# Altium PCB ife18_TS_BMS_Master_STM32.PcbDoc
Units mm, origin at the board's own origin, x right, y up, seen from the top; angles counter-clockwise.
Board outline 95.25 x 63 mm, 2 copper layers (Top Layer, Bottom Layer); 67 components, 59 nets, 264 pads, 68 vias.
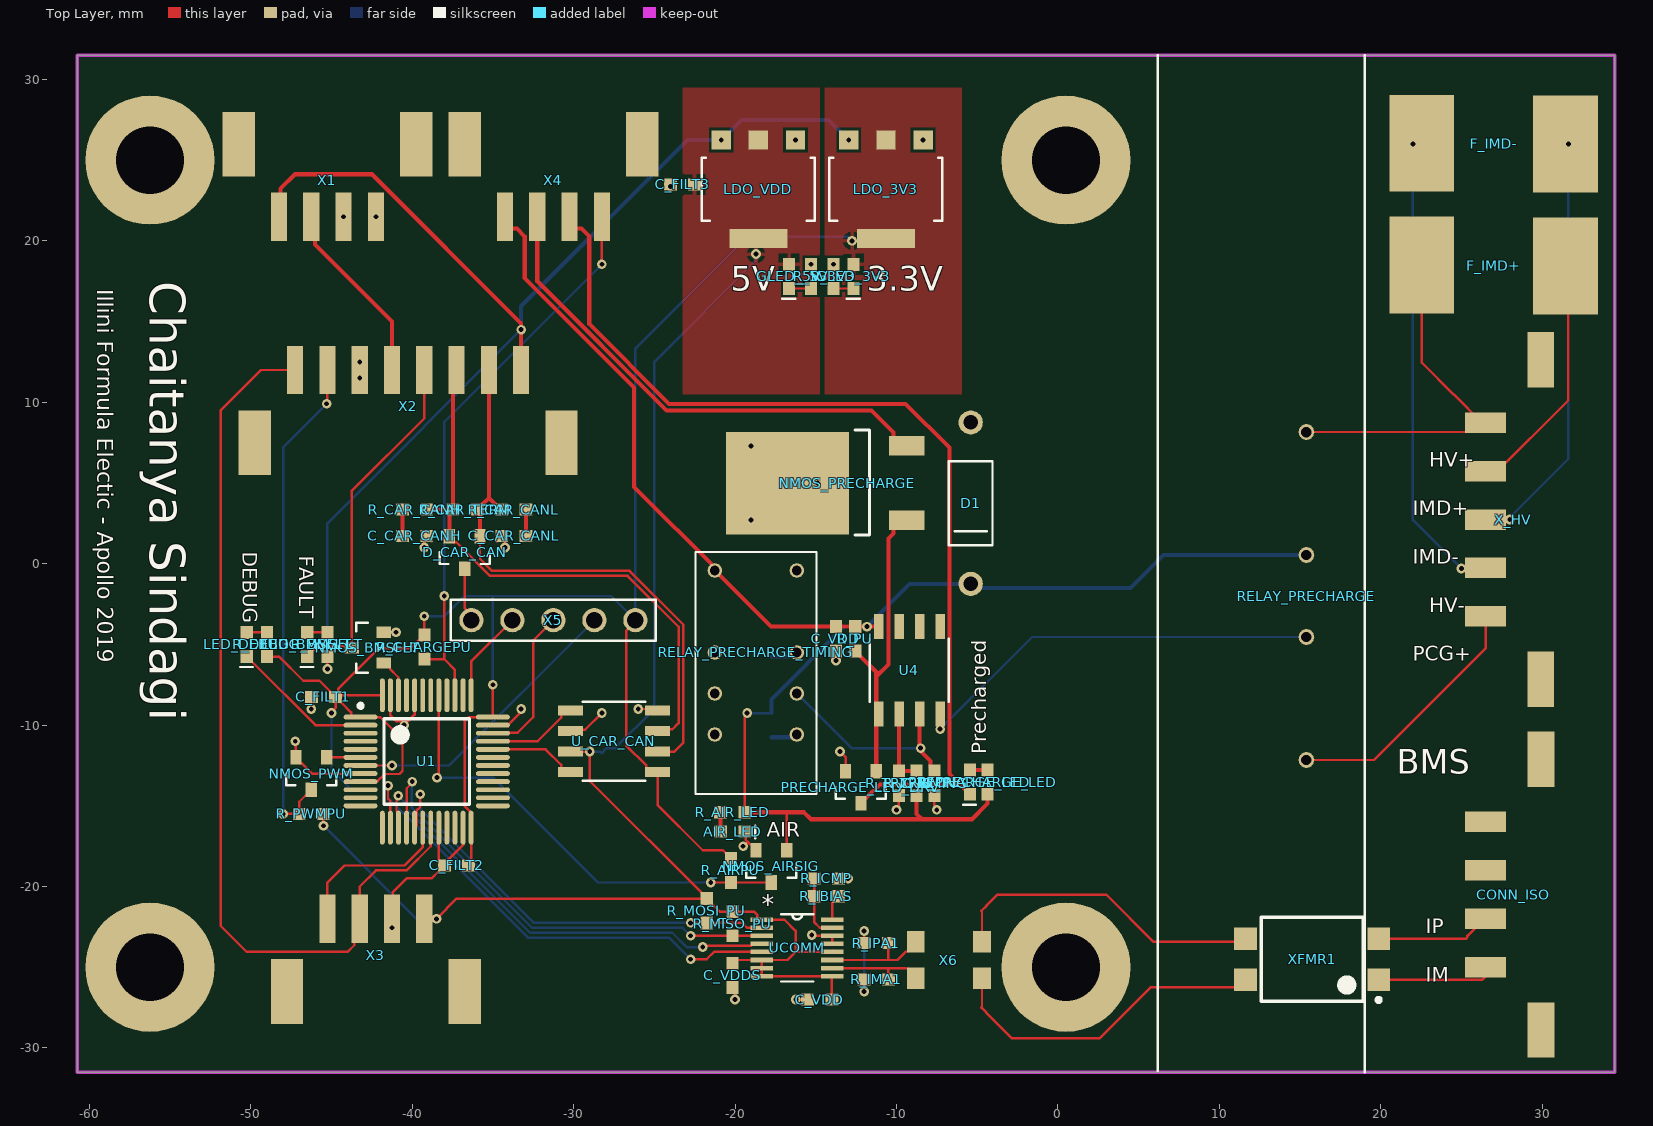
[diagram p0: Top Layer view]
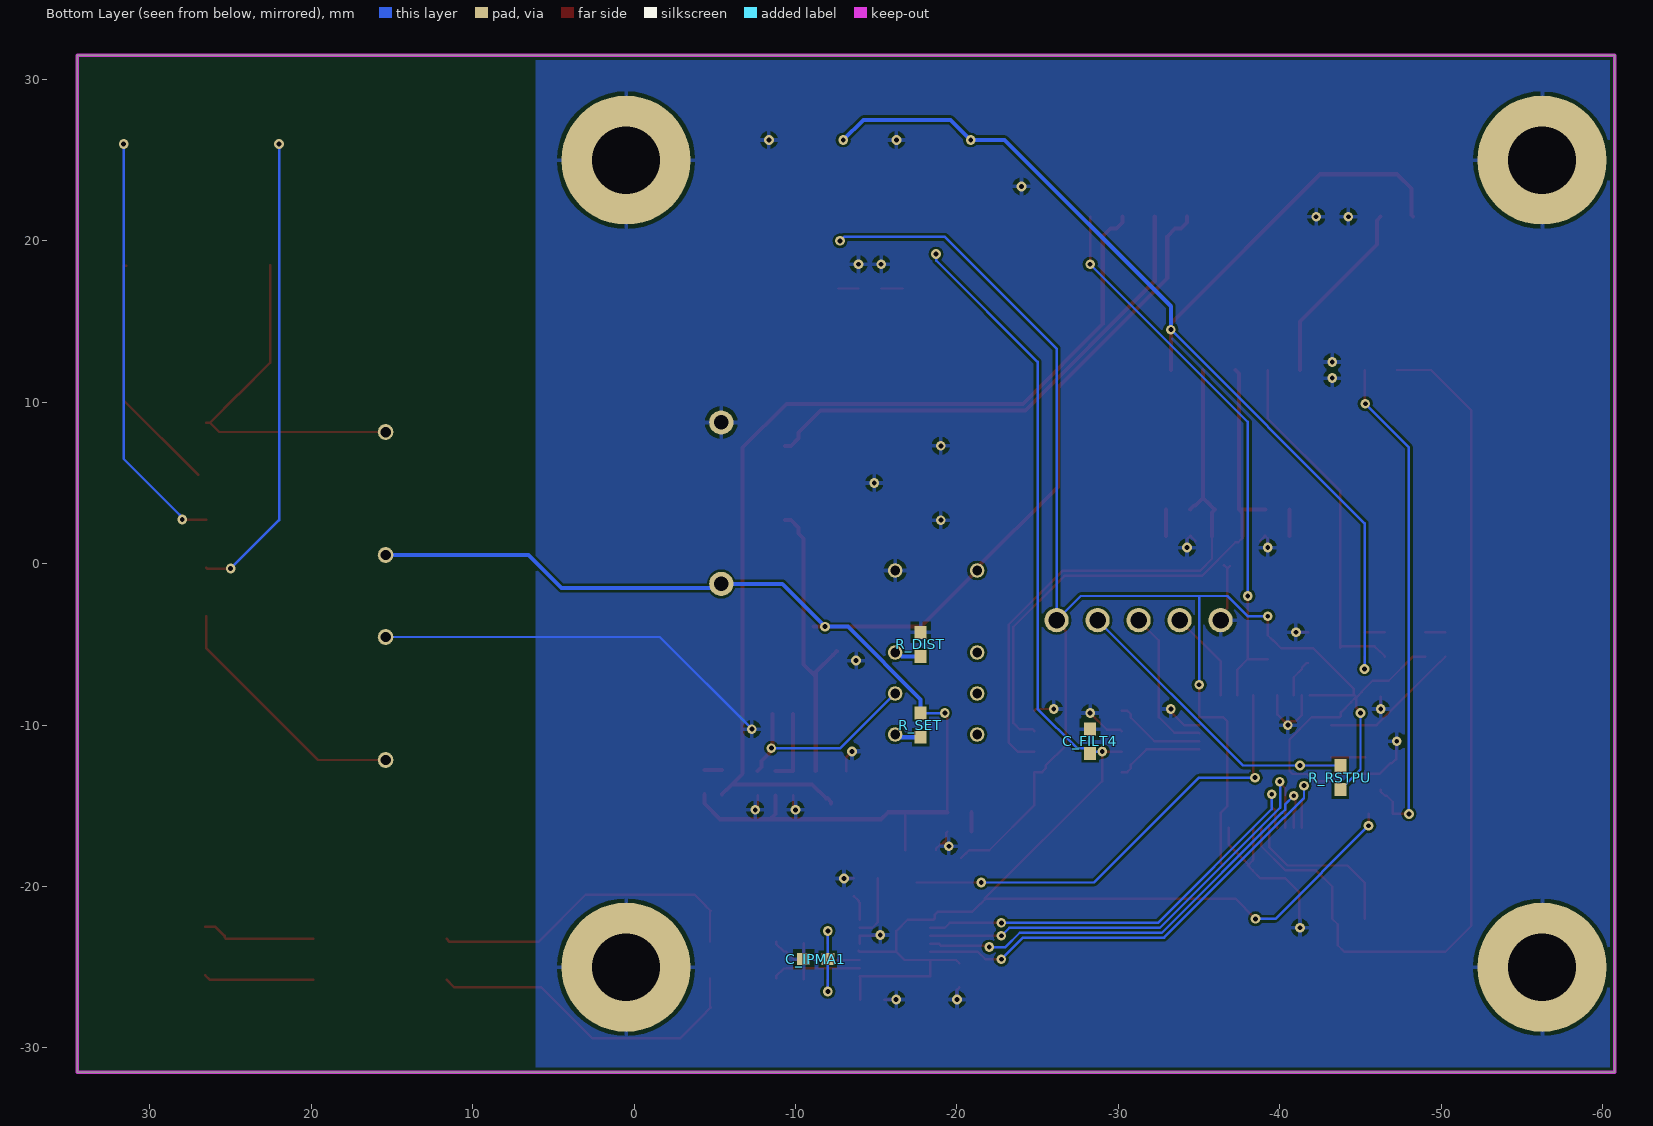
[diagram p1: Bottom Layer view, seen from below]
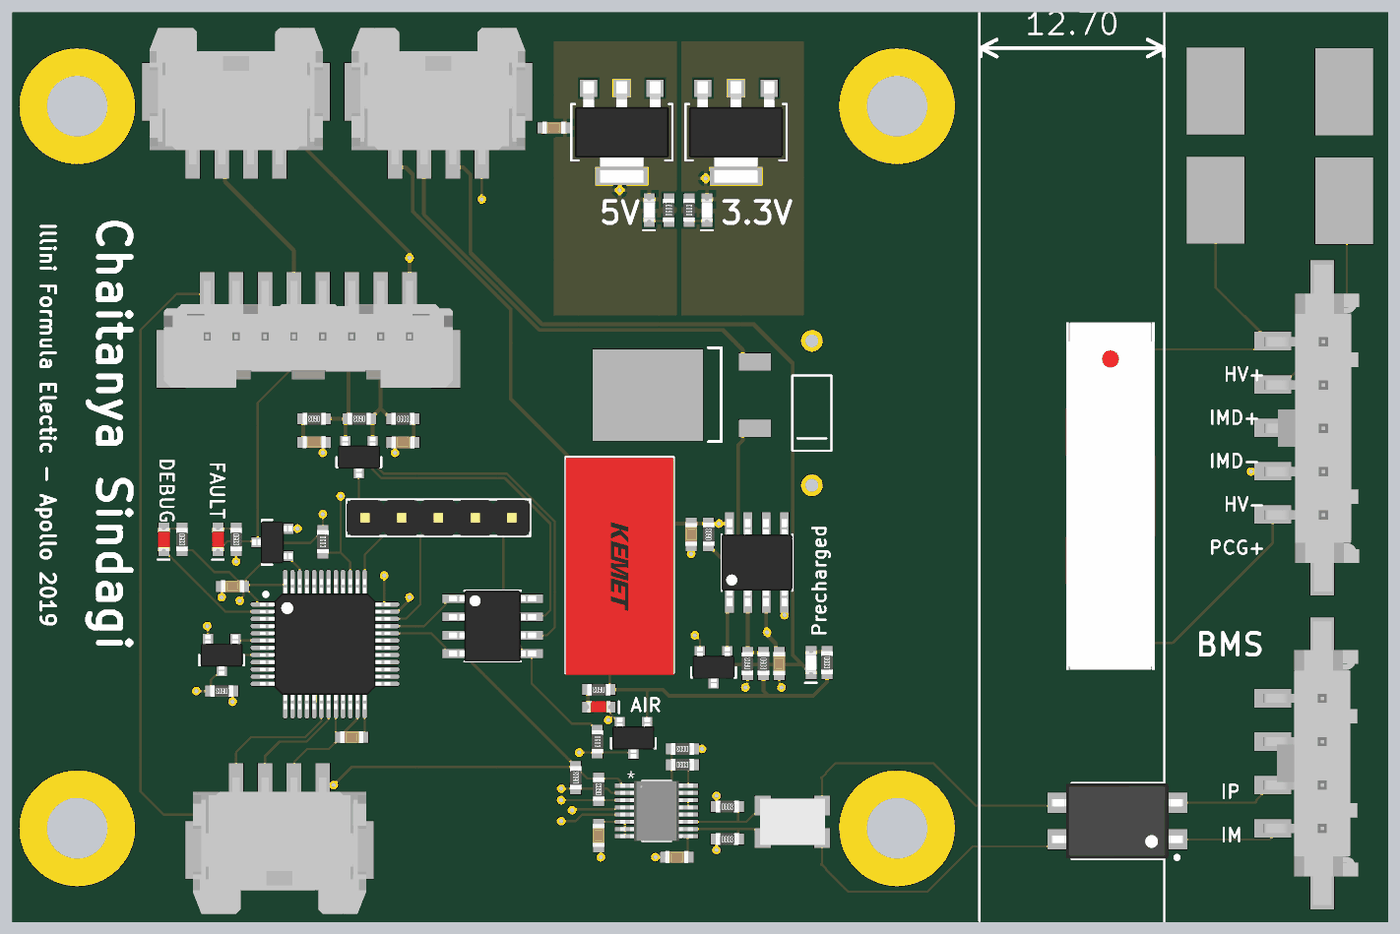
[diagram p2: 3D render of the assembled board from above, using the file's embedded part models]
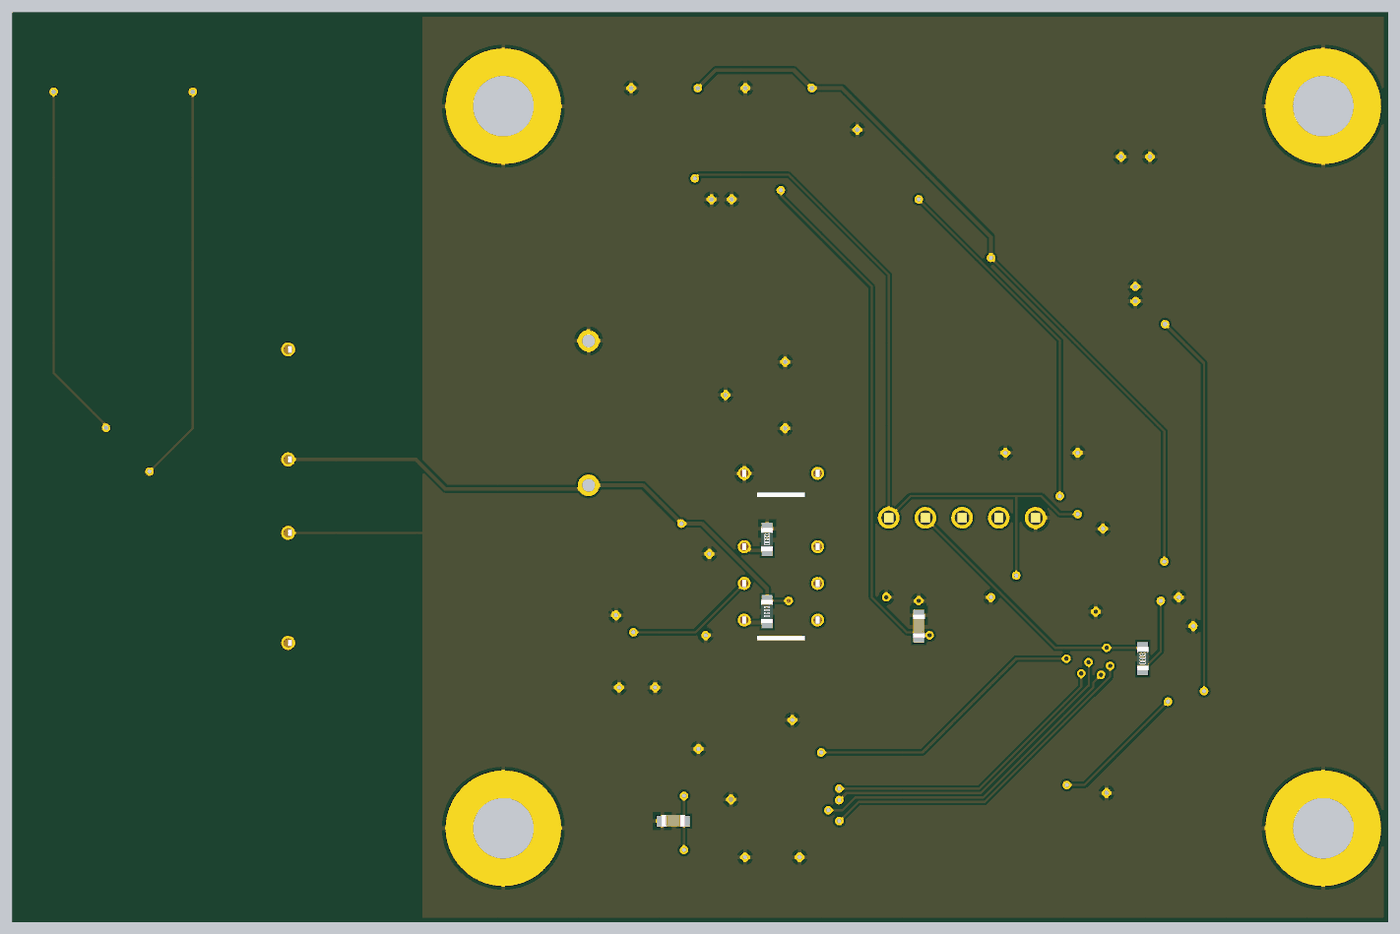
[diagram p3: 3D render of the assembled board from below, using the file's embedded part models]

## Layer stack, top to bottom
Top Solder: solder mask 0.0102, Solder Resist, Dk 3.5
Top Layer: signal copper 0.0356
Dielectric 1: dielectric 0.32, FR-4, Dk 4.8
Bottom Layer: signal copper 0.0356
Bottom Solder: solder mask 0.0102, Solder Resist, Dk 3.5

## Board outline
-60.75,-31.5 34.5,-31.5 34.5,31.5 -60.75,31.5

## Design rules (kind name [scope] priority, off if disabled: settings)
BoardOutlineClearance [All] p1: gap=0.2 ignorepadtopadclearanceinfootprint=FALSE
Clearance "Board Outline" [OnLayer('Keep-Out Layer')] p1: gap=0.2 ignorepadtopadclearanceinfootprint=FALSE
Clearance "Tractive Net Class" [InNetClass('Tractive')] p2: gap=0.8 ignorepadtopadclearanceinfootprint=FALSE
Clearance [NOT InNetClass('Tractive')] p3: gap=0.152 ignorepadtopadclearanceinfootprint=FALSE
HoleSize [All] p1: absolutevalues=TRUE maxlimit=6.3 minlimit=0.3 maxpercent=80.000 minpercent=20.000
MinimumAnnularRing [All] p1: minimumring=0.076
MinimumSolderMaskSliver [All] p1: minsoldermaskwidth=0
PolygonConnect "SOT223 Planes" [HasFootprint('SOT223')] p1: connectstyle=Direct reliefconductorwidth=0.254 reliefentries=4 polygonreliefangle="90 Angle" airgapwidth=0.254
PolygonConnect [All] p2: connectstyle=Relief reliefconductorwidth=0.254 reliefentries=4 polygonreliefangle="90 Angle" airgapwidth=0.254
RoutingVias [All] p1: holewidth=0.3 width=0.6 viastyle="Through Hole" minholewidth=0.3 minwidth=0.6 maxholewidth=6.3 maxwidth=10
SilkToSilkClearance [All] p1: silktosilkclearance=0
SilkToSolderMaskClearance [IsPad] p1: minsilkscreentomaskgap=0 clearancetoexposedcopper=TRUE
SolderMaskExpansion [All] p1: expansion=0.051
Width [All] p1: maxlimit=2.54 minlimit=0.152 preferedwidth=0.254
26 further rules are at their usual default settings.

## Classes and differential pairs
net class Tractive: HV+ HV- IM_ISO IMD+ IMD- IP_ISO Precharge+ TRIG+ TRIG-
component class U_Precharge: AIR_LED C_TIMING C_VDD D1 NMOS_PRECHARGE PRECHARGE_LED PRECHARGE_LED_DRV R_AIR_LED R_DIST R_PRECHARGE_LED R_PU R_SET R_TRIG_B R_TRIG_T RELAY_PRECHARGE RELAY_PRECHARGE_TIMING U4
component class U_Comms: C_IPMA1 C_VDD C_VDDS CONN_ISO R_IBIAS R_ICMP R_IMA1 R_IPA1 R_MISO_PU R_MOSI_PU UCOMM X6 XFMR1
component class ife18_TS_BMS_Master: C_CAR_CANH C_CAR_CANL C_FILT1 C_FILT2 C_FILT3 C_FILT4 D_CAR_CAN F_IMD+ F_IMD- GLED_3V3 GLED_5V GLED_DEBUG LDO_3V3 LDO_VDD LED_BMSFLT LED_DEBUG NMOS_AIRSIG NMOS_BMSFLT NMOS_PWM R_3V3 R_5V R_AIRPU R_BMSFLT R_CAR_CANH R_CAR_CANL R_CAR_TERM R_CHARGEPU R_DEBUG R_PWMPU R_RSTPU U1 U_CAR_CAN X1 X2 X3 X4 X5 X_HV

## Components (designator, comment, footprint, x,y, rotation, side; value= is the part's Value field where it differs from the comment)
AIR_LED "" LEDRED-0603 -20.15,-16.6 r0 top
C_CAR_CANH "560p" CAP-0603 -39.85,1.725 r0 top
C_CAR_CANL "560p" CAP-0603 -33.7,1.725 r180 top
C_FILT1 "1u" CAP-0603 -45.5,-8.25 r0 top
C_FILT2 "1u" CAP-0603 -37.25,-18.695 r0 top
C_FILT3 "1u" CAP-0603 -23.25,23.5 r0 top
C_FILT4 "1u" CAP-0603 -28.25,-11 r270 bottom
C_IPMA1 "CAP 10n" CAP-0603 -11.25,-24.5 r180 bottom
C_TIMING "33u" CAP-0603 -7.65,-13.6 r90 top
C_VDD "1u" CAP-0603 -13.75,-4.65 r90 top
C_VDD "1u" CAP-0603 -14.75,-27 r0 top
C_VDDS "1u" CAP-0603 -20.15,-25.5 r90 top
CONN_ISO "Molex - Micro-Fit 3.0 Series connector,  3.00mm (0.118\") pitch header, 4 positions." 43650-0424 29.93,-20.5 r90 top
D1 "" DO41-10 -5.397,3.75 r270 top
D_CAR_CAN "DIODE-SOT23_PESD1CAN" SOT23 -36.75,0.7 r180 top
F_IMD+ "FUSE_885" FUSE_885 27,18.5 r0 top
F_IMD- "FUSE_885" FUSE_885 27,26 r180 top
GLED_3V3 "" LEDGREEN-0603 -12.65,17.8 r270 top
GLED_5V "" LEDGREEN-0603 -16.65,17.8 r270 top
LDO_3V3 "3V3" SOT223 -10.65,23.2 r180 top
LDO_VDD "5V" SOT223 -18.55,23.2 r180 top
LED_BMSFLT "LEDRED-0603" LEDRED-0603 -46.5,-5 r270 top
LED_DEBUG "LEDRED-0603" LEDRED-0603 -50.25,-5 r270 top
NMOS_AIRSIG "NMOS-SOT23" SOT23 -17.75,-18.75 r180 top
NMOS_BMSFLT "NMOS-SOT23" SOT23 -42.75,-5.2 r90 top
NMOS_PRECHARGE "NMOS-TO252" TO252 -16.759,4.979 r90 top
NMOS_PWM "NMOS-SOT23" SOT23 -46.25,-13 r180 top
PRECHARGE_LED "" LEDGREEN-0603 -5.45,-13.53 r270 top
PRECHARGE_LED_DRV "" SOT23 -12.2,-13.85 r180 top
R_3V3 "200" RES-0603 -13.9,17.8 r90 top
R_5V "200" RES-0603 -15.3,17.8 r90 top
R_AIR_LED "1K" RES-0603 -20.15,-15.4 r180 top
R_AIRPU "10K" RES-0603 -20.25,-19 r270 top
R_BMSFLT "860" RES-0603 -45.25,-5 r270 top
R_CAR_CANH "100" RES-0603 -39.85,3.35 r180 top
R_CAR_CANL "100" RES-0603 -33.7,3.35 r0 top
R_CAR_TERM "120" RES-0603 -36.725,3.35 r180 top
R_CHARGEPU "10K" RES-0603 -39.25,-5.16 r270 top
R_DEBUG "860" RES-0603 -49,-5 r270 top
R_DIST "1.5K" RES-0603 -17.75,-5 r90 bottom
R_IBIAS "1.2K" RES-0603 -14.35,-20.6 r0 top
R_ICMP "800" RES-0603 -14.35,-19.5 r180 top
R_IMA1 "60.4" RES-0603 -11.25,-25.75 r0 top
R_IPA1 "60.4" RES-0603 -11.25,-23.5 r0 top
R_MISO_PU "1K" RES-0603 -20.15,-22.3 r90 top
R_MOSI_PU "1K" RES-0603 -21.75,-21.5 r90 top
R_PRECHARGE_LED "1K" RES-0603 -4.35,-13.53 r270 top
R_PU "10K" RES-0603 -12.55,-4.65 r90 top
R_PWMPU "10K" RES-0603 -46.25,-15.5 r180 top
R_RSTPU "10K" RES-0603 -43.75,-13.25 r90 bottom
R_SET "220K" RES-0603 -17.75,-10 r90 bottom
R_TRIG_B "6.3K" RES-0603 -9.85,-13.6 r90 top
R_TRIG_T "3.7K" RES-0603 -8.75,-13.6 r270 top
RELAY_PRECHARGE "COTO9104" 9104-SIP4 15.4,-2 r270 top
RELAY_PRECHARGE_TIMING "" RELAY-DPDT_EC2 -18.71,-6.77 r270 top
U1 "IC-LQFP48_STM32F103C8T6" STM-LQFP48_M -39.1,-12.25 r0 top
U4 "" SOIC8 -9.2,-6.6 r0 top
U_CAR_CAN "IC-SOIC8_MCP2562" SOIC8 -27.5,-11 r270 top
UCOMM "IC-MSOP16_LTC6820" MSOP16 -16.15,-23.8 r0 top
X1 "Molex 505575-04 4 Position 2.00mm pitch connector wire to board connector Datasheet" 505578-04 -45.25,22 r0 top
X2 "POS8_ML505578-08" 505575-08 -40.25,11.5 r180 top
X3 "Molex 505575-04 4 Position 2.00mm pitch connector wire to board connector Datasheet" 505578-04 -42.25,-22.5 r180 top
X4 "Molex 505575-04 4 Position 2.00mm pitch connector wire to board connector Datasheet" 505578-04 -31.25,22 r0 top
X5 "" POS5_254MM_MALE -31.25,-3.5 r180 top
X6 "SRF4532-101Y" SRF4532 -6.75,-24.551 r0 top
X_HV "Molex - Micro-Fit 3.0 Series connector,  3.00mm (0.118\") pitch header, 5 positions." 43650-0524 30,2.7 r90 top
XFMR1 "ESMIT-4180/A" ISOXFMR_ESMIT4180 15.75,-24.5 r180 top

## Footprints (in the part's own frame and the unit in brackets; to place one, negate y for a bottom-side part, rotate by r counter-clockwise, add the part's x,y. Pads: shape width x height; smd on the part's side, far side on the other; paste and mask are expansions set on the pad)
9104-SIP4 [mm]
  round 0.975 / inner round 1.524 / far side round 0.975 hole 0.65: 1(-10.16,0) 3(-2.54,0) 5(2.54,0) 7(10.16,0)
  body extent -12.03,-3.23 12.03,2.97, height 8.14
43650-0424 [mm]
  rect 1.27x2.54 smd: P$1(4.5,3.43) P$2(1.5,3.43) P$3(-1.5,3.43) P$4(-4.5,3.43)
  rect 3.43x1.65 smd: TAB1(8.39,0) TAB2(-8.39,0)
  body extent -9.82,-2.47 9.83,4.1, height 9.95
43650-0524 [mm]
  rect 1.27x2.54 smd: P$1(6.036,3.503) P$2(3.036,3.503) P$3(0.036,3.503) P$4(-2.964,3.503) P$5(-5.964,3.503)
  rect 3.43x1.65 smd: TAB1(9.926,0.073) TAB2(-9.854,0.073)
  body extent -11.32,-2.47 11.32,4.1, height 9.95
505575-08 [mm]
  rect 1x3 smd: 1(-7,-0.5) 2(-5,-0.5) 3(-3,-0.5) 4(-1,-0.5) 5(1,-0.5) 6(3,-0.5) 7(5,-0.5) 8(7,-0.5)
  rect 2x4 smd: P$3(-9.5,4) P$4(9.5,4)
  body extent -10,-1.41 10,6, height 8.62
505578-04 [mm]
  rect 1x3 smd: 1(-3,-0.5) 2(-1,-0.5) 3(1,-0.5) 4(3,-0.5)
  rect 2x4 smd: P$3(-5.5,4) P$4(5.5,4)
  body extent -6,-1.02 6,8.43, height 5.9
CAP-0603 [mm]
  rect 0.8x0.75 smd: 1(-0.75,0) 2(0.75,0)
  body extent -0.8,-0.4 0.8,0.42, height 0.81
DO41-10 [mm]
  round 1.5 hole 0.9: A(-5,0) K(5,0)
  silkscreen extent -2.6,-1.35 2.6,1.35, body extent -2.6,-1.34 2.6,1.35, height 2.85
FUSE_885 [mm]
  rect 4x6 smd: 1(-4.45,0) 2(4.45,-0.05)
  body extent -5.45,-2.4 5.45,2.4, height 4.95
ISOXFMR_ESMIT4180 [mm]
  rect 1.4x1.4 smd: 1(-4.125,1.27) 2(-4.125,-1.27) 3(4.125,-1.27) 4(4.125,1.27)
  silkscreen extent -4.25,-2.6 3.15,2.64, body extent -4.54,-2.6 4.54,2.6, height 3.5
LEDGREEN-0603 [mm]
  rect 0.8x0.75 smd: A(-0.75,0) K(0.75,0)
  silkscreen extent 1.4,-0.42 1.4,0.38, body extent -0.8,-0.4 0.8,0.4, height 0.53
LEDRED-0603 [mm]
  rect 0.8x0.75 smd: A(-0.75,0) K(0.75,0)
  silkscreen extent 1.4,-0.42 1.4,0.38, body extent -0.8,-0.4 0.8,0.4, height 0.53
MSOP16 [mil]
  rect 55x11 smd: 1(-86,68.95) 2(-86,49.25) 3(-86,29.55) 4(-86,9.85) 5(-86,-9.85) 6(-86,-29.55) 7(-86,-49.25) 8(-86,-68.95) 9(86,-68.95) 10(86,-49.25) 11(86,-29.55) 12(86,-9.85) 13(86,9.85) 14(86,29.55) 15(86,49.25) 16(86,68.95)
  silkscreen extent -39,-82 39,82, body extent -99,-81 100,82, height 43
POS5_254MM_MALE [mm]
  round 1.5 hole 1.02: P$1(-5.08,0) P$2(-2.54,0) P$3(0,0) P$4(2.54,0) P$5(5.08,0)
  silkscreen extent -6.35,-1.27 6.35,1.27, body extent -6.35,-1.24 6.35,1.25, height 8.54
RELAY-DPDT_EC2 [mm]
  round 0.9 / inner round 1.524 / far side round 0.9 hole 0.6: 1(-6.35,2.54) 3(-1.27,2.54) 4(1.27,2.54) 5(3.81,2.54) 8(3.81,-2.54) 9(1.27,-2.54) 10(-1.27,-2.54) 12(-6.35,-2.54)
  silkscreen extent -7.5,-3.75 7.5,3.75, body extent -7.4,-3.75 7.6,3.75, height 8.9
RES-0603 [mm]
  rect 0.8x0.75 smd: 1(-0.75,0) 2(0.75,0)
  body extent -0.8,-0.4 0.8,0.4, height 0.44
SOIC8 [mm]
  rect 0.6x1.55 smd: 1(-1.905,-2.7) 2(-0.635,-2.7) 3(0.635,-2.7) 4(1.905,-2.7) 5(1.905,2.7) 6(0.635,2.7) 7(-0.635,2.7) 8(-1.905,2.7)
  silkscreen extent -2.45,-1.95 2.45,1.95, body extent -2.45,-3.01 2.45,3.01, height 1.5
SOT23 [mm]
  rect 0.7x0.9 smd: 1(-0.95,-1) 2(0.95,-1) 3(0,1)
  silkscreen extent -1.55,0 1.55,0.71, body extent -1.45,-1.41 1.45,1.41, height 1.5
SOT223 [mm]
  rect 1.2x1.2 smd: 1(-2.3,-3.05) 2(0,-3.05) 3(2.3,-3.05)
  rect 3.6x1.2 smd: 4(0,3.05)
  silkscreen extent -3.5,-1.95 3.5,1.95, body extent -3.25,-3.52 3.25,3.5, height 1.8
SRF4532 [mm]
  rect 1.1x1.35 smd: 1(-2.05,-1.125) 2(2.05,-1.125) 3(2.05,1.125) 4(-2.05,1.125)
  body extent -2.25,-1.6 2.25,1.6, height 2.8
STM-LQFP48_M [mm] "QFP, 48-Leads, Body 7x7mm, Pitch 0.5mm, IPC Low Density"
  oval 2.1x0.3 smd: 1(-4.1,2.75) 2(-4.1,2.25) 3(-4.1,1.75) 4(-4.1,1.25) 5(-4.1,0.75) 6(-4.1,0.25) 7(-4.1,-0.25) 8(-4.1,-0.75) 9(-4.1,-1.25) 10(-4.1,-1.75) 11(-4.1,-2.25) 12(-4.1,-2.75) 25(4.1,-2.75) 26(4.1,-2.25) 27(4.1,-1.75) 28(4.1,-1.25) 29(4.1,-0.75) 30(4.1,-0.25) 31(4.1,0.25) 32(4.1,0.75) 33(4.1,1.25) 34(4.1,1.75) 35(4.1,2.25) 36(4.1,2.75)
  oval 0.3x2.1 smd: 13(-2.75,-4.1) 14(-2.25,-4.1) 15(-1.75,-4.1) 16(-1.25,-4.1) 17(-0.75,-4.1) 18(-0.25,-4.1) 19(0.25,-4.1) 20(0.75,-4.1) 21(1.25,-4.1) 22(1.75,-4.1) 23(2.25,-4.1) 24(2.75,-4.1) 37(2.75,4.1) 38(2.25,4.1) 39(1.75,4.1) 40(1.25,4.1) 41(0.75,4.1) 42(0.25,4.1) 43(-0.25,4.1) 44(-0.75,4.1) 45(-1.25,4.1) 46(-1.75,4.1) 47(-2.25,4.1) 48(-2.75,4.1)
  silkscreen extent -4.22,-2.65 2.65,3.57, body extent -4.51,-4.51 4.51,4.51, height 1.55
TO252 [mm]
  rect 1.2x2.2 smd: 1(-2.279,-7.409) 3(2.321,-7.409)
  rect 6.35x7.62 smd: 2(0.021,-0.009)
  silkscreen extent -3.2,-5.09 3.3,-4.2, body extent -3.22,-7.29 3.28,1.41, height 2.3

## Part data
AIR_LED: library part LEDRED-0603
C_CAR_CANH C_CAR_CANL C_FILT1 C_FILT2 C_FILT3 C_FILT4 C_TIMING C_VDD C_VDD C_VDDS: library part CAP-0603
C_IPMA1: library part CAP-0603, "CAP-0603"
CONN_ISO: library part POS4_MF43650-0424, Package=43650-0424, DeviceName=43650-0424, DeviceSetName=HEADER_POS4_?, GateName_1=G$1, LibraryName="MOLEX Micro-Fit", SymbolName_1=HEADER_POS4
D1: library part DIODE-DO41-10
GLED_3V3 GLED_5V PRECHARGE_LED: library part LEDGREEN-0603
LDO_3V3 LDO_VDD: library part LDO-SOT223_SPX1117
NMOS_PRECHARGE: Package=TO252, DeviceSetName=DMP10H400SK3-13, GateName_1=G$1, LibraryName=IFE_Transistors, SymbolName_1=LABELED-PMOS
PRECHARGE_LED_DRV: library part NMOS-SOT23
R_3V3 R_5V R_AIR_LED R_AIRPU R_BMSFLT R_CAR_CANH R_CAR_CANL R_CAR_TERM R_CHARGEPU R_DEBUG R_DIST R_IBIAS R_ICMP R_IMA1 R_IPA1 R_MISO_PU R_MOSI_PU R_PRECHARGE_LED R_PU R_PWMPU R_RSTPU R_SET R_TRIG_B R_TRIG_T: library part RES-0603
RELAY_PRECHARGE: Package=9104-SIP4, DeviceSetName=COTO9104, GateName_1=G$1, LibraryName=Discharge_Components_Altium_Export, SymbolName_1=SPST_REED
RELAY_PRECHARGE_TIMING: library part RELAY_EC2, Package=DPDT_2.54, DeviceSetName=EC2, GateName_1=G$1, LibraryName=KEMET, SymbolName_1=MONOSTABLERELAY
U1: I/Os (High Current)=37, Operating Frequency(F) (Processor speed) (MHz)=72, PartNumber=STM32F103C8T6, Supplier Part Number 1=497-6063-ND, Supply Voltage(Vcc) min (V)=2, A/D Converter="2x12-bit (10 Channel)", ComponentLink1Description="Manufacturer URL", ComponentLink1URL=http://www.st.com/web/en/home.html, ComponentLink2Description=Datasheet, ComponentLink2URL=http://www.st.com/st-web-ui/static/active/en/resource/technical/document/datasheet/CD00161566.pdf, ComponentLink3Description="Package Specification", ComponentLink3URL=http://www.st.com/st-web-ui/static/active/en/resource/technical/document/datasheet/DM00058181.pdf, Core="ARM Cortex-M3", DatasheetVersion="Rev. 16", FLASH Size (Prog) (kB)=64, Internal RAM Size (kB)=20, Mounting Technology="Surface Mount", PackageDescription="48-Pin Low Profile Quad Flat Package, 7 x 7 mm Body, 0.5 mm Pitch", PackageReference=LQFP48, PackageVersion="Rev. 6, 06/2013", Packing=Tray, Supplier 1=Digi-Key, Supplier 2=Farnell, Supplier 3=Newark, Supplier 4=Newark, Supplier 5=Mouser, Supplier Part Number 2=1447637, Supplier Part Number 3=59M2182, Supplier Part Number 4=57P1222, Supplier Part Number 5=511-STM32F103C8T6
U4: library part IC-SOIC8_LM393
X1 X3 X4: library part POS4_ML505578-04, Package=505575-04, DeviceSetName=505575-04, GateName_1=G$1, LibraryName="MOLEX Micro-Lock", SymbolName_1=4POS
X2: Manufacturer=Molex, Manufacturer Part Number=172065-0308, ComponentLink1Description=http://datasheet.octopart.com/172065-0308-Molex-datasheet-101610459.pdf?src-supplier=Farnell, ComponentLink1URL=http://datasheet.octopart.com/172065-0308-Molex-datasheet-101610459.pdf?src-supplier=Farnell, ComponentLink2Description=http://datasheet.octopart.com/172065-0308-Molex-datasheet-96710946.pdf?src-supplier=Farnell, ComponentLink2URL=http://datasheet.octopart.com/172065-0308-Molex-datasheet-96710946.pdf?src-supplier=Farnell, Pricing 1="1 = 9.17000, 68 = 7.57265, 136 = 7.37338, 544 = 6.17768, 1020 = 5.46027 (USD)", Stock 1=323, Supplier 1=Digikey
X5: library part POS5_254MM_MALE, Package=43650-0524, DeviceName=43650-0524, DeviceSetName=HEADER_POS5_?, GateName_1=G$1, LibraryName="MOLEX Micro-Fit", SymbolName_1=HEADER_POS5
X6: library part CMC_SRF4532
X_HV: library part POS5_MF43650-0524, Package=43650-0524, DeviceName=43650-0524, DeviceSetName=HEADER_POS5_?, GateName_1=G$1, LibraryName="MOLEX Micro-Fit", SymbolName_1=HEADER_POS5
XFMR1: library part ISOXFMR_ESMIT4180

## Free pads (board coordinates)
  round 8 hole 4.2: 8(-56.25,-25) 8(0.5,-25) 9(-56.25,25) 9(0.5,25)

## Via types
v1: diameter 0.6, hole 0.3, Top Layer to Bottom Layer, 68 vias

## Nets (pads, with @x,y where several pads share a name; then routed paths per layer and width w, separated by ;. In a path a pad name is that pad's centre, name@x,y a point inside that pad or via, vN(x,y) a via of type N, cw(c..) or ccw(c..) an arc to the next point about the centre after c; other vN are vias at no path point)
3V3: C_FILT1.2 C_FILT2.2 GLED_3V3.A LDO_3V3.2 LDO_3V3.4 R_AIRPU.1 R_CHARGEPU.1 R_DEBUG.2 R_RSTPU.1 U1.1 U1.9 U1.24 U1.36 U1.48 U_CAR_CAN.5 X5.P$1 | length 117.8
  Top Layer w0.152: R_DEBUG.2 -48.25,-5.75 -46.75,-7.25 -45.75,-7.25 -45.074,-7.926 -45.074,-7.951 -44.775,-8.25 C_FILT1.2 ; v1(-45,-9.25) -45,-9.187 -44.75,-8.937 C_FILT1.2 ; U1.9 -43.172,-13.472 -42.138,-13.472 -41.695,-13.029 -40.779,-13.029 -40.6,-12.85 -40.6,-10.88 -41.98,-9.5 U1.1 -43.721,-9.5 -43.789,-9.432 -43.789,-9.211 -44.426,-8.574 -44.426,-8.549 -44.725,-8.25 C_FILT1.2 ; U1.48 C_FILT1.2@-44.65,-8.15 ; v1(-39.25,-3.25) R_CHARGEPU.1 -39.25,-4.435 -39.549,-4.734 -39.574,-4.734 -40.09,-5.25 -41.91,-5.25 -41.937,-5.223 -42.063,-5.223 -44.576,-7.736 -44.576,-8.076 C_FILT1.2@-44.65,-8.15 ; C_FILT2.2 -36.35,-18.545 U1.24 -36.35,-15.415 -36.75,-15.015 -36.75,-9.779 -36.471,-9.5 U1.36 v1(-35,-7.5) ; X5.P$1 -26.17,-3.598 -26.75,-4.178 -26.75,-11.25 -25.494,-12.506 -25.494,-12.681 -25.27,-12.905 U_CAR_CAN.5 -24.8,-14.95 -22,-17.75 -20.75,-17.75 -20.574,-17.926 -20.549,-17.926 -20.25,-18.225 R_AIRPU.1 ; C_FILT1.2 C_FILT1.2@-44.65,-8.15
  Bottom Layer w0.152: v1(-45,-9.25) -45,-12.75 R_RSTPU.1 ; v1(-39.25,-3.25) -38,-3.25 -36.75,-2 -35,-2 ; v1(-35,-7.5) -35,-2 ; v1(-12.75,20) -13,20.25 -19.25,20.25 -26.17,13.33 X5.P$1 -27.67,-2 -35,-2
5V: C_FILT3.2 C_FILT4.2 C_VDD.2@-14,-27 C_VDDS.2 GLED_5V.A LDO_VDD.2 LDO_VDD.4 R_MISO_PU.2 R_MOSI_PU.2 R_PWMPU.1 U_CAR_CAN.3 UCOMM.1 UCOMM.6 UCOMM.7 UCOMM.8 UCOMM.9 UCOMM.12 X3.1 | length 98.7
  Top Layer w0.152: v1(-45.5,-16.229) R_PWMPU.1 ; X3.1 v1(-38.5,-22) -37.25,-20.75 R_MOSI_PU.2 ; U_CAR_CAN.3 v1(-29,-11.635) -29,-13.465 -21.715,-20.75 R_MOSI_PU.2 ; C_VDDS.2 -19.951,-24.551 UCOMM.6 ; C_VDD.2@-14,-27 -14,-25.586 UCOMM.9 UCOMM.8 UCOMM.7 UCOMM.6 ; UCOMM.12@-13.902,-23.987 UCOMM.12 -16.25,-24.05 ; R_MOSI_PU.2 -21.75,-20.775 -21.451,-21.074 -21.426,-21.074 -20.95,-21.55 R_MISO_PU.2 -18.833,-21.55 -18.613,-21.77 -18.613,-21.985 -18.55,-22.049 UCOMM.1 -16.951,-22.049 -16.25,-22.75 -16.25,-24.05 ; UCOMM.6 -16.75,-24.551 -16.25,-24.05
  Bottom Layer w0.152: v1(-45.5,-16.229) -39.729,-22 v1(-38.5,-22) ; v1(-29,-11.635) -28.365,-11.635 C_FILT4.2 -28.25,-11.725 -27.951,-11.426 -27.426,-11.426 -25,-9 -25,12.5 -18.73,18.77 -18.73,19.153 v1(-18.7,19.183)
AIR: C_VDD.2@-13.75,-3.9 D1.K NMOS_AIRSIG.1 R_AIR_LED.1 R_PRECHARGE_LED.2 R_PU.2 R_SET.2 R_TRIG_T.2 RELAY_PRECHARGE.3 RELAY_PRECHARGE_TIMING.12 U4.8 X4.1 | length 105
  Top Layer w0.152: R_AIR_LED.1 -19.4,-9.521 -19.25,-9.371 v1(-19.25,-9.25) ; NMOS_AIRSIG.1 -16.8,-15.45 -16.75,-15.4
  Top Layer w0.254: X4.1 -34.25,21.141 -33.877,20.768 -33.518,20.768 -33.029,20.279 -33.029,17.705 -26.247,10.923 -26.247,4.747 RELAY_PRECHARGE_TIMING.12@-21.036,-0.464 ; RELAY_PRECHARGE_TIMING.12 -17.77,-3.9 -13.75,-3.9 R_PU.2 v1(-11.828,-3.9) U4.8 ; R_AIR_LED.1 -16.75,-15.4 -15.729,-15.4 -15.3,-15.829 -8.421,-15.829 ; R_TRIG_T.2 -8.75,-15.5 -8.421,-15.829 ; R_PRECHARGE_LED.2 -4.35,-14.85 -5.329,-15.829 -8.421,-15.829
  Bottom Layer w0.152: v1(-19.25,-9.25) R_SET.2
  Bottom Layer w0.254: R_SET.2 -17.75,-8.405 -13.245,-3.9 v1(-11.828,-3.9) -9.178,-1.25 D1.K -5.147,-1.5 4.5,-1.5 6.54,0.54 RELAY_PRECHARGE.3
BMS_CS: U1.14 UCOMM.5 | length 30.9
  Top Layer w0.152: v1(-41.5,-13.75) -41.5,-14.566 -41.35,-14.716 U1.14 ; v1(-22.75,-24.5) -21.75,-24.5 -21.3,-24.05 UCOMM.5
  Bottom Layer w0.152: v1(-41.5,-13.75) -41.5,-14.506 -40.281,-15.725 -40.268,-15.725 -32.829,-23.164 -24.086,-23.164 v1(-22.75,-24.5)
BMS_FLT: LED_BMSFLT.K NMOS_BMSFLT.3 X2.4 | length 22.1
  Top Layer w0.152: LED_BMSFLT.K -46.5,-5.725 -46.201,-5.426 -46.176,-5.426 -45.871,-5.121 -43.829,-5.121 NMOS_BMSFLT.3 -43.75,4.5 -39.25,9 X2.4
BMS_MISO: R_MISO_PU.1 U1.16 UCOMM.3 | length 29.6
  Top Layer w0.152: U1.16 -40.337,-16.337 -40.337,-13.911 -40,-13.574 v1(-40,-13.5) ; v1@-22.749,-23.05 R_MISO_PU.1 ; R_MISO_PU.1 UCOMM.3
  Bottom Layer w0.152: v1(-40,-13.5) -40.029,-13.529 -40.029,-15.115 -40.016,-15.115 -32.576,-22.555 -23.245,-22.555 v1(-22.75,-23.049)
BMS_MOSI: R_MOSI_PU.1 U1.17 UCOMM.2 | length 27.3
  Top Layer w0.152: U1.17 -39.729,-16.229 -39.729,-15.293 -39.5,-15.065 v1(-39.5,-14.28) ; v1(-22.75,-22.25) R_MOSI_PU.1 -19.549,-22.25 -19.25,-22.549 UCOMM.2
  Bottom Layer w0.152: v1(-39.5,-14.28) -39.5,-15.2 -32.45,-22.25 v1(-22.75,-22.25)
BMS_SCK: U1.15 UCOMM.4 | length 28.8
  Top Layer w0.152: v1(-40.865,-14.374) -40.971,-14.48 -40.971,-15.289 -40.85,-15.41 U1.15 ; v1(-22,-23.75) -21.929,-23.679 -19.022,-23.679 -18.893,-23.55 UCOMM.4
  Bottom Layer w0.152: v1(-40.865,-14.374) -40.333,-14.906 -40.333,-15.241 -40.155,-15.42 -40.142,-15.42 -32.703,-22.86 -23.89,-22.86 -23,-23.75 v1(-22,-23.75)
CAR_CANRx: U1.32 U_CAR_CAN.4 | length 5.5
  Top Layer w0.152: U1.32 -31.733,-11.5 -30.768,-12.466 -30.768,-12.681 -30.544,-12.905 U_CAR_CAN.4
CAR_CANTx: U1.33 U_CAR_CAN.1 | length 5.7
  Top Layer w0.152: U1.33 -32.233,-11 -30.768,-9.534 -30.768,-9.319 -30.544,-9.095 U_CAR_CAN.1
CARCANH: D_CAR_CAN.2 R_CAR_CANH.1 R_CAR_TERM.2 U_CAR_CAN.7 X2.3 | length 36.2
  Top Layer w0.152: D_CAR_CAN.2 -37.7,1.601 -37.426,1.327 -37.254,1.327 -35.177,-0.75 -26.657,-0.75 -23.5,-3.907 -23.5,-9.879 -23.886,-10.265 -24.7,-10.265 U_CAR_CAN.7
  Top Layer w0.254: R_CAR_CANH.1 R_CAR_TERM.2 ; D_CAR_CAN.2 -37.7,3.125 R_CAR_TERM.2 ; X2.3 -37.475,11.775 R_CAR_TERM.2
CARCANL: D_CAR_CAN.1 R_CAR_CANL.1 R_CAR_TERM.1 U_CAR_CAN.6 X2.2 | length 36.6
  Top Layer w0.152: D_CAR_CAN.1 -35.8,0.304 -35.05,-0.445 -26.531,-0.445 -23.195,-3.781 -23.195,-11.08 -23.75,-11.635 U_CAR_CAN.6
  Top Layer w0.254: D_CAR_CAN.1 -35.8,3.175 R_CAR_TERM.1 -35.95,3.35 -35.702,3.598 -35.702,3.623 -35.25,4.075 ; X2.2 -35.25,4.075 ; R_CAR_CANL.1 -34.698,3.598 -34.773,3.598 -35.25,4.075
CHARGE_EN: R_CHARGEPU.2 U1.39 X4.4 | length 35.2
  Top Layer w0.152: R_CHARGEPU.2 -38.014,-5.91 ; v1(-38.014,-2) -38.014,-5.91 ; U1.39 -37.35,-6.574 -38.014,-5.91 ; v1(-28.25,18.55) X4.4
  Bottom Layer w0.152: v1(-38.014,-2) -38.014,8.786 v1(-28.25,18.55)
CURR: U1.18 X3.4 | length 10.3
  Top Layer w0.152: X3.4 -45.25,-19.75 -44.195,-18.695 -40.476,-18.695 -39.35,-17.569 U1.18
CURR_HR: U1.19 X2.8 X3.3 | length 57.1
  Top Layer w0.152: X2.8 -49.374,12 -51.874,9.5 -51.874,-22.426 -50.25,-24.05 -44,-24.05 -43.589,-23.639 -43.589,-22.339 X3.3 -43.25,-20 -42.25,-19 -40.35,-19 -38.85,-17.5 U1.19
FAN_PWM: NMOS_PWM.1 U1.6 | length 2.1
  Top Layer w0.152: NMOS_PWM.1 U1.6
FAN_PWM_5V: NMOS_PWM.3 R_PWMPU.2 X2.7 | length 31.5
  Top Layer w0.152: v1(-48,-15.5) R_PWMPU.2 -47,-14.75 -46.624,-14.374 -46.524,-14.374 -46.25,-14.1 NMOS_PWM.3 ; v1(-45.3,9.906) -45.25,9.956 X2.7
  Bottom Layer w0.152: v1(-48,-15.5) -48,7.206 v1(-45.3,9.906)
GND: AIR_LED.K C_CAR_CANH.2 C_CAR_CANL.2 C_FILT1.1 C_FILT2.1 C_FILT3.1 C_FILT4.1 C_IPMA1.1 C_TIMING.1 C_VDD.1 C_VDDS.1 D1.A D_CAR_CAN.3 LDO_3V3.1 LDO_VDD.1 NMOS_AIRSIG.2 NMOS_BMSFLT.2 NMOS_PRECHARGE.2 NMOS_PWM.2 pad.8 pad.9 PRECHARGE_LED_DRV.2 R_3V3.2 R_5V.2 R_DIST.2 R_ICMP.1 R_TRIG_B.1 RELAY_PRECHARGE.5 RELAY_PRECHARGE_TIMING.1 U1.8 U1.20 U1.23 U1.35 U1.44 U1.47 U4.4 U_CAR_CAN.2 U_CAR_CAN.8 UCOMM.13 UCOMM.14 X1.3 X1.4 X2.6 X3.2 X5.P$5 | length 68.8
  Top Layer w0.152: v1(-47.25,-11) -47.2,-11.05 NMOS_PWM.2 -47.2,-12.1 -46.926,-12.374 -46.826,-12.374 -46.2,-13 U1.8 ; v1(-46.25,-9) C_FILT1.1 ; NMOS_BMSFLT.2 v1(-41,-4.25) ; U1.47 -41.35,-9.4 -41,-9.75 -40.625,-9.75 -40.625,-9.754 -40.5,-9.879 v1(-40.5,-10) ; X3.2 -41.211,-21.96 -41.211,-20.361 -40.35,-19.5 -38.805,-19.5 -38.324,-19.019 -38.324,-18.994 C_FILT2.1@-38.025,-18.695 ; v1@-40.5,-9.75 -40.25,-9.75 -39.85,-9.35 U1.44 ; v1(-39.25,1) -39.25,1.575 C_CAR_CANH.2 -39.075,1.725 -38.776,1.426 C_CAR_CANH.2@-38.776,1.401 ; U1.20 -38.35,-18.307 -38.324,-18.333 -38.324,-18.396 C_FILT2.1@-38.025,-18.695 ; C_FILT2.1@-38.025,-18.593 -36.85,-17.418 U1.23 ; C_FILT2.1 C_FILT2.1@-38.025,-18.695 ; D_CAR_CAN.3@-36.914,-0.136 D_CAR_CAN.3 ; D_CAR_CAN.3@-36.536,-0.086 D_CAR_CAN.3 ; X5.P$5 -36.33,-3.157 -36.75,-2.737 D_CAR_CAN.3 ; U1.35 -34.065,-10 -33.25,-9.185 v1(-33.25,-9) ; C_CAR_CANL.2@-34.774,1.401 -34.774,1.426 -34.475,1.725 C_CAR_CANL.2 -34.25,1.525 v1(-34.25,1) ; U_CAR_CAN.2 -30.121,-10.286 -29.286,-10.286 v1(-28.25,-9.25) ; v1(-26,-9) -24.895,-9 U_CAR_CAN.8 ; C_VDDS.1 -20,-26.4 v1(-20,-27) ; v1(-19.5,-17.5) -19.459,-17.5 -19.205,-17.245 ; AIR_LED.K -19.336,-16.664 -19.336,-17.114 -19.205,-17.245 ; NMOS_AIRSIG.2 -18.7,-17.65 -18.974,-17.376 -19.074,-17.376 -19.205,-17.245 ; v1(-16.229,-27) C_VDD.1@-15.5,-27 ; v1(-15.25,-23) -15.201,-23.049 UCOMM.14 UCOMM.13 ; R_ICMP.1 v1(-13,-19.5) ; v1(-13.5,-11.635) -13.15,-11.985 PRECHARGE_LED_DRV.2 ; v1(-10,-15.25) -10,-15.129 -9.85,-14.979 R_TRIG_B.1 ; C_TIMING.1 -7.65,-14.979 -7.5,-15.129 v1(-7.5,-15.25)
  Bottom Layer w0.152: v1(-7.295,-10.25) -1.585,-4.54 RELAY_PRECHARGE.5
  other v1: -41.25,-22.549 -13.75,-6 -19,2.7 -14.877,5 -19,7.3 -43.25,11.5 -43.25,12.5 -15.3,18.55 -13.9,18.55 -44.25,21.5 -42.25,21.5 -24,23.373 -16.25,26.25 -8.35,26.25
HV+: F_IMD+.1 RELAY_PRECHARGE.1 X_HV.P$1 | length 22.7
  Top Layer w0.152: RELAY_PRECHARGE.1 25.705,8.16 X_HV.P$1@26.282,8.736 ; F_IMD+.1 22.55,12.45 24.517,10.483 24.535,10.483 X_HV.P$1@26.282,8.736 ; X_HV.P$1 X_HV.P$1@26.282,8.736
HV-: F_IMD-.2 X_HV.P$4 | length 29.1
  Top Layer w0.152: v1(25,-0.3) 26.461,-0.3 X_HV.P$4
  Bottom Layer w0.152: v1(22,26) 22,2.7 v1(25,-0.3)
IBIAS: R_IBIAS.2 UCOMM.16 | length 1.6
  Top Layer w0.152: UCOMM.16 -13.966,-20.988 -13.924,-20.946 -13.924,-20.899 -13.625,-20.6 R_IBIAS.2
ICMP: R_IBIAS.1 R_ICMP.2 UCOMM.15 | length 4
  Top Layer w0.152: R_ICMP.2 R_IBIAS.1 -15.1,-22.199 -14.75,-22.549 UCOMM.15
IM_ISO: CONN_ISO.P$4 XFMR1.1 | length 6.8
  Top Layer w0.152: XFMR1.1 26.3,-25.77 CONN_ISO.P$4@26.57,-25.5
IMA: R_IMA1.2 UCOMM.10 X6.1 | length 6.2
  Top Layer w0.152: UCOMM.10 -10.5,-25.051 ; R_IMA1.2 -10.5,-25.051 ; X6.1 -8.8,-25.551 -9.274,-25.077 -9.399,-25.077 -9.425,-25.051 -10.5,-25.051
IMD+: F_IMD+.2 X_HV.P$2 | length 15
  Top Layer w0.152: X_HV.P$2@27,5.5 31.628,10.128 31.628,18.45 F_IMD+.2
IMD-: F_IMD-.1 X_HV.P$3 | length 26.4
  Top Layer w0.152: X_HV.P$3 v1(28,2.736) ; F_IMD-.1 v1(31.628,26)
  Bottom Layer w0.152: v1(28,2.736) 28,2.857 28.154,3.011 28.154,3.025 31.628,6.5 v1(31.628,26)
IMD_FLT: X1.2 X2.5 | length 11.6
  Top Layer w0.254: X1.2 -46.018,21.268 -46.018,19.768 -41.25,15 X2.5
IP_ISO: CONN_ISO.P$3 XFMR1.2 | length 7
  Top Layer w0.152: XFMR1.2 25.287,-23.23 25.376,-23.141 25.376,-23.059 25.935,-22.5 CONN_ISO.P$3@26.57,-22.5
IPA: R_IPA1.2 UCOMM.11 X6.4 | length 6.8
  Top Layer w0.152: UCOMM.11 -10.5,-24.551 ; R_IPA1.2 -10.5,-24.551 ; X6.4 -8.8,-23.551 -9.274,-24.024 -9.399,-24.024 -9.925,-24.551 -10.5,-24.551
NetAIR_LED_A: AIR_LED.A R_AIR_LED.2 | length 1.2
  Top Layer w0.254: AIR_LED.A R_AIR_LED.2
NetC_CAR_CANH_1: C_CAR_CANH.1 R_CAR_CANH.2 | length 1.6
  Top Layer w0.254: C_CAR_CANH.1 R_CAR_CANH.2
NetC_CAR_CANL_1: C_CAR_CANL.1 R_CAR_CANL.2 | length 1.6
  Top Layer w0.254: C_CAR_CANL.1 R_CAR_CANL.2
NetC_IPMA1_2: C_IPMA1.2 R_IMA1.1 R_IPA1.1 | length 5.2
  Top Layer w0.152: v1(-12,-26.5) R_IMA1.1 ; R_IPA1.1 v1(-12,-22.75)
  Bottom Layer w0.152: v1(-12,-26.5) C_IPMA1.2 v1(-12,-22.75)
NetGLED_3V3_K: GLED_3V3.K R_3V3.1 | length 1.3
  Top Layer w0.152: R_3V3.1 GLED_3V3.K
NetGLED_5V_K: GLED_5V.K R_5V.1 | length 1.4
  Top Layer w0.152: GLED_5V.K R_5V.1
NetLED_BMSFLT_A: LED_BMSFLT.A R_BMSFLT.1 | length 1.3
  Top Layer w0.152: LED_BMSFLT.A R_BMSFLT.1
NetLED_DEBUG_A: LED_DEBUG.A R_DEBUG.1 | length 1.3
  Top Layer w0.152: LED_DEBUG.A R_DEBUG.1
NetLED_DEBUG_K: LED_DEBUG.K U1.2 | length 8.8
  Top Layer w0.152: LED_DEBUG.K -50.25,-5.775 -49.951,-6.074 -49.926,-6.074 -46,-10 U1.2
NetNMOS_AIRSIG_3: NMOS_AIRSIG.3 R_AIRPU.2 U1.41 | length 28.8
  Top Layer w0.152: v1(-38.469,-13.25) -38.469,-13.129 -38.35,-13.01 U1.41 ; v1(-21.5,-19.75) R_AIRPU.2 NMOS_AIRSIG.3 NMOS_AIRSIG.3@-17.5,-19.75
  Bottom Layer w0.152: v1(-38.469,-13.25) -35,-13.25 -28.5,-19.75 v1(-21.5,-19.75)
NetNMOS_BMSFLT_1: NMOS_BMSFLT.1 U1.46 | length 2.4
  Top Layer w0.152: NMOS_BMSFLT.1 -41.65,-6.15 -41.376,-6.424 -41.376,-6.524 -40.865,-7.035 -40.865,-8.135 U1.46
NetNMOS_TRIG_3: 
NetPRECHARGE_LED_A: PRECHARGE_LED.A R_PRECHARGE_LED.1 | length 1.1
  Top Layer w0.254: PRECHARGE_LED.A R_PRECHARGE_LED.1
NetR_DIST_1: R_DIST.1 RELAY_PRECHARGE_TIMING.3 | length 1.7
  Bottom Layer w0.254: R_DIST.1 -16.595,-5.75 -16.345,-5.5 RELAY_PRECHARGE_TIMING.3
NetR_SET_1: R_SET.1 RELAY_PRECHARGE_TIMING.5 | length 1.7
  Bottom Layer w0.254: R_SET.1 -16.515,-10.75 -16.345,-10.58 RELAY_PRECHARGE_TIMING.5
NetX6_2: X6.2 XFMR1.4 | length 20.5
  Top Layer w0.152: X6.2 -4.7,-27.45 -4.75,-27.5 -4.725,-27.5 -4.426,-27.799 -4.426,-27.824 -2.86,-29.39 2.61,-29.39 5.75,-26.25 11.145,-26.25 XFMR1.4
NetX6_3: X6.3 XFMR1.3 | length 20
  Top Layer w0.152: X6.3 -4.7,-21.55 -4.75,-21.5 -4.725,-21.5 -4.426,-21.201 -4.426,-21.176 -3.75,-20.5 3,-20.5 5.926,-23.426 11.429,-23.426 XFMR1.3
PRECHARGE: NMOS_PRECHARGE.1 PRECHARGE_LED_DRV.1 R_PU.1 U4.1 | length 18.7
  Top Layer w0.254: R_PU.1 -12.55,-5.425 -12.302,-5.673 -12.277,-5.673 -11.25,-6.7 -11.25,-7 ; PRECHARGE_LED_DRV.1 -11.25,-7 ; NMOS_PRECHARGE.1 -9.709,2.7 -10.182,2.227 -10.182,1.868 -10.5,1.55 -10.5,-6.25 -11.25,-7
Precharge+: RELAY_PRECHARGE.7 X_HV.P$5 | length 15.9
  Top Layer w0.152: RELAY_PRECHARGE.7 19.59,-12.16 26.497,-5.253 X_HV.P$5
PRECHARGE_COMPLETE: PRECHARGE_LED.K PRECHARGE_LED_DRV.3 X4.3 | length 61.5
  Top Layer w0.254: X4.3 -30.25,21.141 -29.877,20.768 -29.518,20.768 -29.029,20.279 -29.029,14.854 -24.082,9.906 -9.428,9.906 -6.716,7.194 -6.716,-13.014 -6.059,-13.671 ; PRECHARGE_LED_DRV.3 -12.2,-14.75 -11.977,-14.527 -11.877,-14.527 -11.021,-13.671 -6.059,-13.671 ; PRECHARGE_LED.K -5.45,-14.255 -5.698,-14.007 -5.723,-14.007 -6.059,-13.671
PWR_IN: LDO_3V3.3 LDO_VDD.3 R_BMSFLT.2 X1.1 X2.1 | length 77.6
  Top Layer w0.152: v1(-45.25,-6.524) R_BMSFLT.2
  Top Layer w0.254: X1.1 -48.147,21.603 -48.147,23.232 -47.25,24.129 -42.484,24.129 -33.25,14.895 v1(-33.25,14.5) X2.1
  Bottom Layer w0.152: v1(-45.25,-6.524) -45.25,2.5 v1(-33.25,14.5)
  Bottom Layer w0.254: v1(-33.25,14.5) -33.25,15.95 -22.95,26.25 v1(-20.85,26.25) -19.6,27.5 -14.2,27.5 v1(-12.95,26.25)
RELAY-: NMOS_PRECHARGE.3 X4.2 | length 31.3
  Top Layer w0.254: X4.2 -32.25,17.5 -24.25,9.5 -11.55,9.5 -10.182,8.132 -10.182,7.773 -9.709,7.3 NMOS_PRECHARGE.3
RESET: R_RSTPU.2 U1.7 X5.P$2 | length 20.7
  Top Layer w0.152: U1.7 v1(-41.25,-12.5)
  Bottom Layer w0.152: R_RSTPU.2 v1(-41.25,-12.5) -37.71,-12.5 X5.P$2
SWCLK: U1.37 X5.P$4 | length 5.7
  Top Layer w0.152: U1.37 -36.35,-6.06 X5.P$4
SWDIO: U1.34 X5.P$3 | length 9.4
  Top Layer w0.152: U1.34 -34.972,-10.472 -33.472,-10.472 -32.5,-9.5 -32.5,-4.75 X5.P$3
TIMING: C_TIMING.2 RELAY_PRECHARGE_TIMING.4 U4.3 | length 12.9
  Top Layer w0.254: v1@-8.565,-11.55 -7.898,-12.217 -7.898,-12.602 C_TIMING.2 ; v1@-8.565,-11.426 U4.3
  Bottom Layer w0.152: RELAY_PRECHARGE_TIMING.4 -12.784,-11.426 v1(-8.5,-11.426)
TRIG+: CONN_ISO.P$2
TRIG-: CONN_ISO.P$1
TRIGGER: U1.29
V_TRIG: R_TRIG_B.2 R_TRIG_T.1 U4.2 | length 4.7
  Top Layer w0.254: U4.2 -9.835,-12.835 R_TRIG_B.2 R_TRIG_T.1
pads on no net: CONN_ISO.TAB1 CONN_ISO.TAB2 RELAY_PRECHARGE_TIMING.8 RELAY_PRECHARGE_TIMING.9 RELAY_PRECHARGE_TIMING.10 U1.3 U1.4 U1.5 U1.10 U1.11 U1.12 U1.13 U1.21 U1.22 U1.25 U1.26 U1.27 U1.28 U1.30 U1.31 U1.38 U1.40 U1.42 U1.43 U1.45 U4.5 U4.6 U4.7 X1.P$3 X1.P$4 X2.P$3 X2.P$4 X3.P$3 X3.P$4 X4.P$3 X4.P$4 X_HV.TAB1 X_HV.TAB2

## Polygon pours and split planes (outlines as drawn)
3V3 on Top Layer "Top Layer-3V3" (solid, pour order 4): -14.45,29.5 -5.95,29.5 -5.95,10.5 -14.45,10.5
5V on Top Layer "Top Layer-5V" (solid, pour order 0): -23.25,29.5 -14.75,29.5 -14.75,10.5 -23.25,10.5
GND on Bottom Layer "Bottom Layer-GND" (solid, pour order 6): -60.75,-31.5 -60.75,36.5 6.1,36.5 6.1,-31.5

## Keep-outs
Keep-Out Layer:
  the board outline again, w0.2

## Silkscreen, mask and mechanical layers (free items; w line width, h text height)
Top Overlay:
  lines w0.15: 6.2,-31.425 6.2,31.5 ; 19,-31.5 19,31.5
  text "Chaitanya Sindagi" at -56.25,17.5 h2.2 r270
  text "Illini Formula Electic - Apollo 2019" at -59.5,17 h1 r270
  text "5V" at -20.25,16.9 h1.52
  text "3.3V" at -11.85,16.9 h1.52
  text "HV+" at 23,6 h0.91
  text "IMD+" at 22,3 h0.91
  text "DEBUG" at -50.5,0.75 h0.91 r270
  text "FAULT" at -47,0.5 h0.91 r270
  text "IMD-" at 22,0 h0.91
  text "HV-" at 23,-3 h0.91
  text "PCG+" at 22,-6 h0.91
  text "Precharged" at -4.45,-11.8 h0.91 r90
  text "BMS" at 21,-13 h1.52
  text "AIR" at -18.05,-16.9 h0.91
  text "IP" at 22.8,-22.9 h0.91
  text "IM" at 22.8,-25.9 h0.91

## Dimensions
18.975,29.025 to 6.275,29.025 on Top Overlay

## Text inside footprints (layer, text, board x,y; h text height)
UCOMM: Top Overlay "*" at -18.334,-22.049 h1.97